# Altium PCB MotionClock.PcbDoc
Units mil, origin at the board's own origin, x right, y up, seen from the top; angles counter-clockwise.
Board outline 2550 x 2500 mil, 2 copper layers (Top Layer, Bottom Layer); 33 components, 30 nets, 129 pads, 0 vias.
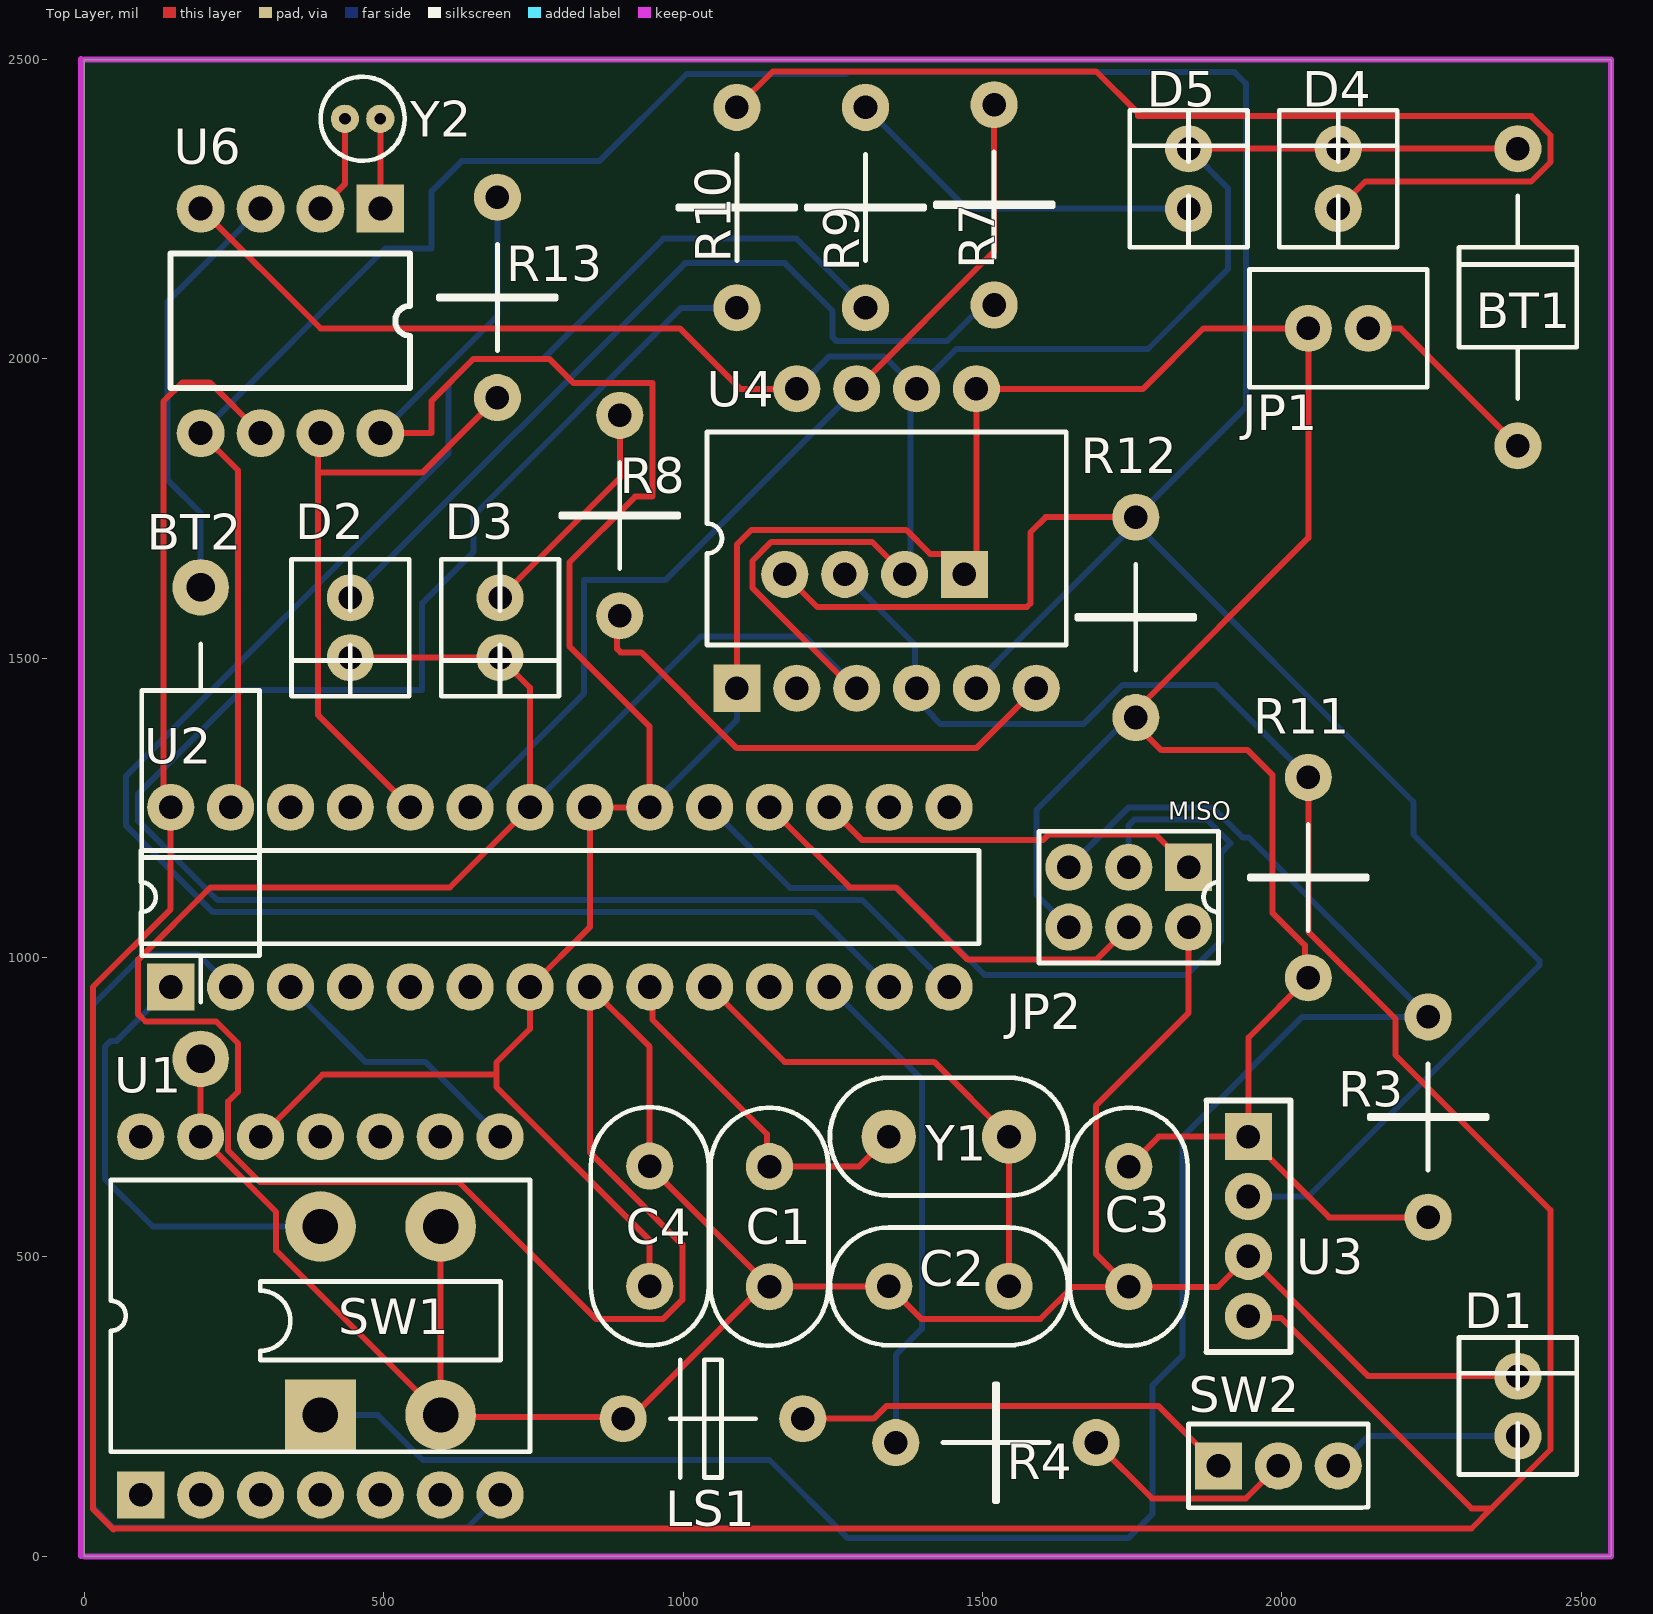
[diagram p0: Top Layer view]
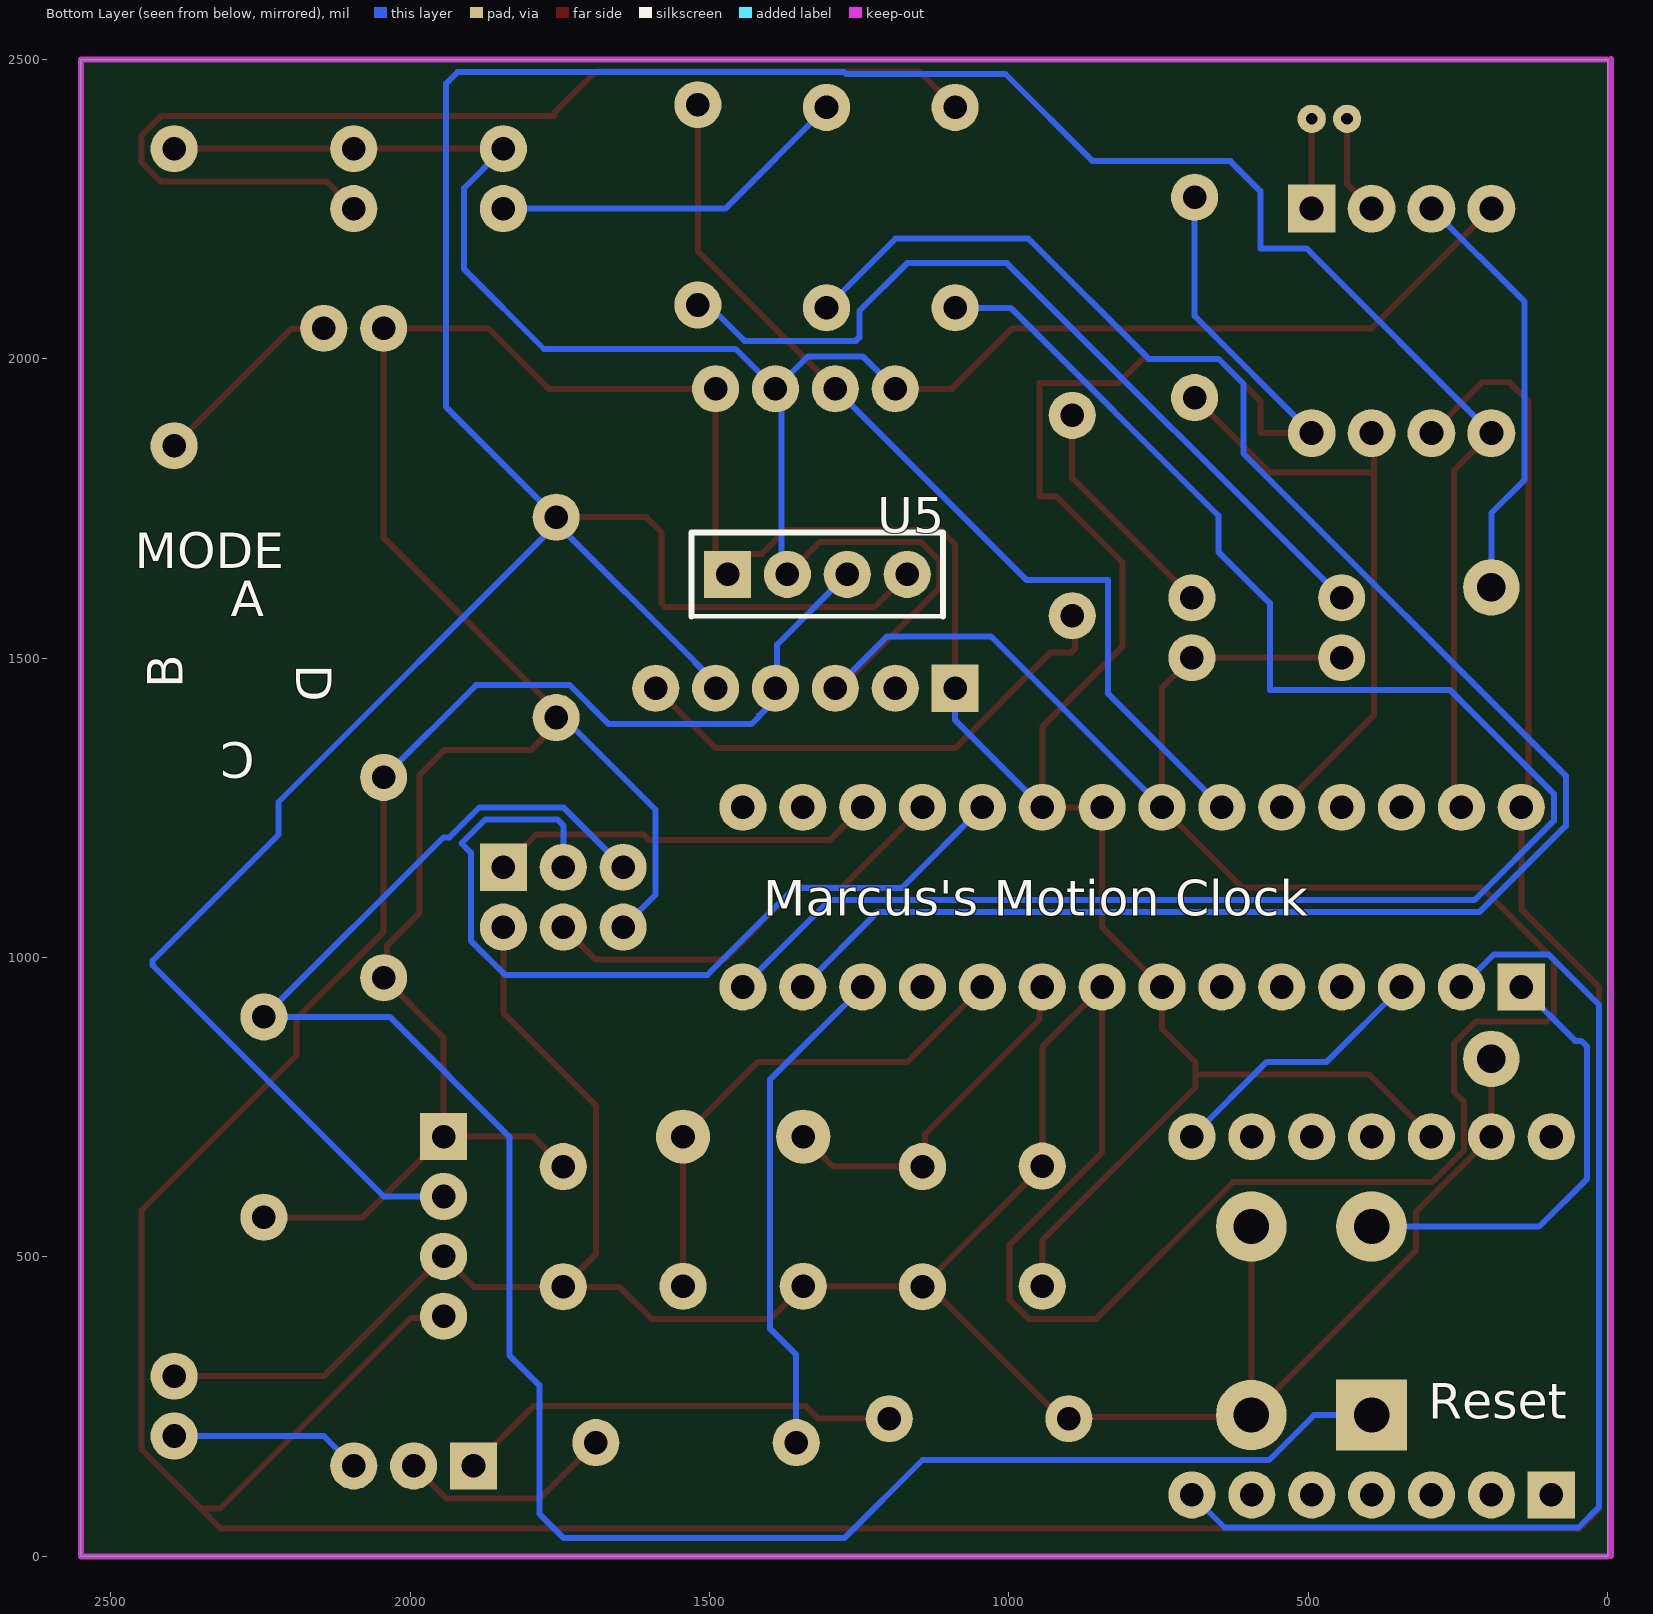
[diagram p1: Bottom Layer view, seen from below]

## Layer stack, top to bottom
Top Solder: solder mask 0.4, Solder Resist, Dk 3.5
Top Layer: signal copper 1.4
Dielectric 1: dielectric 12.6, FR-4, Dk 4.8
Bottom Layer: signal copper 1.4
Bottom Solder: solder mask 0.4, Solder Resist, Dk 3.5

## Board outline
2550,0 2550,2500 0,2500 0,0

## Design rules (kind name [scope] priority, off if disabled: settings)
Clearance [All] p1: gap=10 ignorepadtopadclearanceinfootprint=FALSE except(0: Arc-Hole Track-Hole SMDPad-Hole THPad-Hole Via-Hole Fill-Hole Poly-Hole Region-Hole Text-Hole)
PolygonConnect [All] p1: connectstyle=Relief reliefconductorwidth=10 reliefentries=4 polygonreliefangle="90 Angle" airgapwidth=10
RoomDefinition MotionClockSchematic [InComponentClass('MotionClockSchematic')] p1: confinementstyle=ConfineIn formatcopy=TRUE lockcomponents=FALSE outline -5.63,0.98 2544.37,0.98 2544.37,2500.98 -5.63,2500.98
RoutingVias [All] p1: holewidth=28 width=50 viastyle="Through Hole" minholewidth=28 minwidth=50 maxholewidth=28 maxwidth=50
SolderMaskExpansion [All] p1: expansion=4 istentingtop=FALSE
Width [All] p1: maxlimit=10 minlimit=10 preferedwidth=10
30 further rules are at their usual default settings.

## Components (designator, comment, footprint, x,y, rotation, side; value= is the part's Value field where it differs from the comment)
BT1 "Main 3V3 Battery" "MAIN BATTERY PINS" 2394.37,1854.92 r90 top
BT2 "Cell Battery" "CELL HOLDER" 194.37,1618.39 r270 top
C1 "20pF" CAPACITOR 1144.37,450.2 r90 top
C2 "20pF" CAPACITOR 1544.37,450.98 r180 top
C3 "100nF" CAPACITOR 1744.37,450.2 r90 top
C4 "100nF" CAPACITOR 944.37,450.98 r90 top
D1 "LED" LED 2394.37,200.98 r90 top
D2 "Double Tap" LED 444.37,1600.98 r270 top
D3 "Single Tap" LED 694.37,1600.98 r270 top
D4 "TEST LED 2" LED 2094.37,2250.98 r90 top
D5 "TEST LED 1" LED 1844.37,2250.98 r90 top
JP1 "Jumper" JUMPER 2044.37,2050.98 r0 top
JP2 "ISP Headers" "ISP HEADER" 1844.37,1150.98 r270 top
LS1 "Piezzo Buzzer" "PIEZZO BUZZER V2" 1200,230 r180 top
R3 "10k" RESISTOR 2244.37,566.34 r90 top
R4 "1k" RESISTOR 1690,190 r180 top
R7 "1k" RESISTOR 1519.47,2424.65 r270 top
R8 "1k" RESISTOR 894.37,1570.98 r90 top
R9 "1k" RESISTOR 1304.73,2420 r270 top
R10 "1k" RESISTOR 1090,2420 r270 top
R11 "10k" RESISTOR 2044.37,1300.98 r270 top
R12 "10k" RESISTOR 1756.31,1735.63 r270 top
R13 "10k" RESISTOR 690,2270 r270 top
SW1 "Pushbutton" ? 394.37,236.02 r90 top
SW2 "SPDT DIP Switch" SPDT 1894.37,150.98 r90 top
U1 "Seeduino Xiao" "SEEDUINO XIAO" 94.37,102.56 r90 top
U2 "Atmega328p" ATMEGA328P 144.37,950.98 r90 top
U3 "AM2320" AM2320 1944.37,700.98 r0 top
U4 "Accelerometer" ACCEL 1090,1450 r90 top
U5 "SSD1306 OLED" SSD1306 1470,1640 r90 bottom
U6 "MCP7940N" MCP7940N 494.37,2250.98 r270 top
Y1 "16MHz Crystal Oscil" "16MHZ CRYSTAL" 1544.37,700.98 r180 top
Y2 "32.768 kHz Crystal Oscil" 32.768KHZ 494.37,2400.98 r180 top

## Footprints (in the part's own frame and the unit in brackets; to place one, negate y for a bottom-side part, rotate by r counter-clockwise, add the part's x,y. Pads: shape width x height; smd on the part's side, far side on the other; paste and mask are expansions set on the pad)
"16MHZ CRYSTAL" [mm]
  round 2.3 hole 1: 1(0,0) 2(5.1,0)
  silkscreen extent -2.5,-2.5 7.6,2.5
32.768KHZ [mm]
  round 1.2 hole 0.5: 1(0,0) 2(1.5,0)
  silkscreen extent -1.03,-1.78 2.53,1.78
ACCEL [mm]
  round 2 hole 1: 1(12.7,-2.54) 2(12.7,-5.08) 3(12.7,-7.62) 4(12.7,-10.16) 6(0,-2.54) 7(0,-5.08) 8(0,-7.62) 9(0,-10.16) 10(0,-12.7)
  rect 2x2 hole 1: 5(0,0)
  silkscreen extent 1.84,-13.97 10.86,1.27
AM2320 [mm]
  rect 2x2 hole 1: 1(0,0)
  round 2 hole 1: 2(0,-5.08) 3(0,-7.62) 4(0,-2.54)
  silkscreen extent -1.78,-9.14 1.78,1.52
ATMEGA328P [mm]
  rect 2x2 hole 1: 1(0,0)
  round 2 hole 1: 2(0,-2.54) 3(0,-5.08) 4(0,-7.62) 5(0,-10.16) 6(0,-12.7) 7(0,-15.24) 8(0,-17.78) 9(0,-20.32) 10(0,-22.86) 11(0,-25.4) 12(0,-27.94) 13(0,-30.48) 14(0,-33.02) 15(7.62,-33.02) 16(7.62,-30.48) 17(7.62,-27.94) 18(7.62,-25.4) 19(7.62,-22.86) 20(7.62,-20.32) 21(7.62,-17.78) 22(7.62,-15.24) 23(7.62,-12.7) 24(7.62,-10.16) 25(7.62,-7.62) 26(7.62,-5.08) 27(7.62,-2.54) 28(7.62,0)
  silkscreen extent 1.84,-34.29 5.78,1.27
CAPACITOR [mm]
  round 2 hole 1: 1(0,0) 2(5.1,0)
  silkscreen extent -2.5,-2.5 7.6,2.5
"CELL HOLDER" [mm]
  round 2.4 hole 1.2: A(0,0) K(20,0)
  silkscreen extent 2.4,-2.5 17.6,2.5
"ISP HEADER" [mm]
  rect 2x2 hole 1: 1(0,0)
  round 2 hole 1: 2(0,-2.54) 3(0,-5.08) 4(2.54,-5.08) 5(2.54,-2.54) 6(2.54,0)
  silkscreen extent -1.52,-6.35 4.06,1.27
JUMPER [mm]
  round 2 hole 1: 1(0,0) 2(2.54,0)
  silkscreen extent -2.5,-2.5 5.04,2.5
LED [mm]
  round 2 hole 1: A(0,0) K(2.54,0)
  silkscreen extent -1.64,-2.5 4.18,2.5
"MAIN BATTERY PINS" [mm]
  round 2 hole 1: A(0,0) K(12.6,0)
  silkscreen extent 2,-2.5 10.6,2.5
MCP7940N [mil]
  rect 80x80 hole 40: 1(0,0)
  round 80 hole 40: 2(0,-100) 3(0,-200) 4(0,-300) 5(375,-300) 6(375,-200) 7(375,-100) 8(375,0)
  silkscreen extent 75,-350 300,50
"PIEZZO BUZZER V2" [mm]
  round 2 hole 1: A(0,0) K(7.62,0)
  silkscreen extent 2,-2.5 5.62,2.5
RESISTOR [mm]
  round 2 hole 1: 1(0,0) 2(8.5,0)
  silkscreen extent 2,-2.5 6.5,2.5
"SEEDUINO XIAO" [mm]
  round 2 hole 1: 1(15.2,-5.08) 2(15.2,-2.54) 3(15.2,-15.24) 4(0,-15.24) 5(0,-10.16) 6(0,-12.7) 7(0,-5.08) 8(0,-7.62) 9(15.2,-12.7) 10(15.2,-10.16) 11(15.2,-7.62) 12(0,-2.54) 14(15.2,0)
  rect 2x2 hole 1: 13(0,0)
  silkscreen extent 1.84,-16.51 13.36,1.27
SPDT [mm]
  round 2 hole 1: 1(0,-2.54) 3(0,-5.08)
  rect 2x2 hole 1: 2(0,0)
  silkscreen extent -1.78,-6.35 1.78,1.27
SSD1306 [mm]
  rect 2x2 hole 1: 1(0,0)
  round 2 hole 1: 2(0,-2.54) 3(0,-5.08) 4(0,-7.62)
  silkscreen extent -1.78,-9.14 1.78,1.52
? [mm]
  rect 3x3 hole 1.5: 1(0,0)
  round 3 hole 1.5: 2(0,-5.1) 3(8,0) 4(8,-5.1)
  silkscreen extent 2.33,-7.65 5.67,2.55

## Part data
C1 C2 C3 C4: library part Capacitor
D2 D3 D4 D5: library part LED
R3 R11 R12 R13: library part "10k Resistor"
R4 R7 R8 R9 R10: library part "1k Resistor"

## Nets (pads, with @x,y where several pads share a name; then routed paths per layer and width w, separated by ;. In a path a pad name is that pad's centre, name@x,y a point inside that pad or via, vN(x,y) a via of type N, cw(c..) or ccw(c..) an arc to the next point about the centre after c; other vN are vias at no path point)
+3V3: C3.2 C4.1 JP1.1 JP2.4 R3.1 R11.2 R12.2 R13.1 U1.1 U2.7 U2.20 U2.21 U3.1 U4.4 U4.5 U5.1 U6.8 | length 7947.6
  Top Layer w10: U1.1 397.82,804.43 688.51,804.43 ; U6.8 580,1875.98 580,1930 650,2000 776.69,2000 816.69,1960 948.74,1960 948.74,1770 920,1770 810,1660 810,1520 944.37,1385.63 U2.20 U2.21 844.37,1050.98 U2.7 744.37,880.98 688.51,825.13 688.51,804.43 ; C4.1 944.37,527.88 688.51,783.73 688.51,804.43 ; U4.5 1090,1690 1114.37,1714.37 1372.52,1714.37 1412.52,1674.37 1435.63,1674.37 U5.1 1490,1660 U4.4 1768.39,1950 1869.37,2050.98 JP1.1 2044.37,1700.98 1744.37,1400.98 1798.88,1346.48 1943.02,1346.48 1984.37,1305.13 1984.37,1074.95 2038.61,1020.71 2038.61,972.1 R11.2 1944.37,866.34 U3.1 ; C3.2 1794.37,700.98 U3.1 ; R3.1 2079.02,566.34 U3.1
  Bottom Layer w10: U6.8 690,2071.61 R13.1 ; U2.20 1090,1396.61 U4.5 ; JP2.4 1590,1105.35 1590,1246.61 R12.2@1744.37,1400.98
GND: BT1.K BT2.K C1.1 C2.2 C3.1 C4.2 D1.K D2.K D3.K D4.K D5.K JP2.6 LS1.K SW1.2 SW1.4 U1.2 U2.8 U2.22 U3.2 U4.1 U4.3 U4.7 U5.2 U6.4 | length 11974.3
  Top Layer w10: BT2.K U1.2 320.31,575.04 320.31,510.87 SW1.2 ; U6.4 394.49,2050.86 994.49,2050.86 1095.35,1950 U4.1 ; D2.K D3.K 744.37,1450.98 U2.22 610.59,1117.2 210.63,1117.2 90,996.57 90,905.4 102.17,893.23 220.15,893.23 256.61,856.77 256.61,775.92 240,759.31 240,678.46 293.42,625.04 625.83,625.04 854.26,396.61 966.89,396.61 998.74,428.46 998.74,520.51 844.37,674.88 U2.8 944.37,850.98 C4.2 944.37,650.98 1144.37,450.98 C1.1 ; SW1.4@595.16,504.84 SW1.2 ; U4.7 1283.11,1450 1115.63,1617.48 1115.63,1662.52 1147.48,1694.37 1315.63,1694.37 U5.2 U5.2@1380,1650 ; U4.3@1380,1940 U4.3 ; JP2.6 1844.37,907.61 1690,753.24 1690,504.57 C3.1 ; D5.K D4.K BT1.K ; D1.K 2144.37,300.98 U3.2 1893.58,450.2 C3.1 ; SW1.2 598.17,233.01 896.99,233.01 LS1.K 912.09,230 1132.28,450.2 C1.1 ; C1.1 1144.76,450.59 1343.19,450.59 C2.2 1397.95,396.61 1597.02,396.61 1650.6,450.2 C3.1
  Bottom Layer w10: U2.22 1030,1536.61 1203.39,1536.61 U4.7 ; U4.1 1244.37,2004.37 1335.63,2004.37 U4.3 ; U5.2 1380,1650 1380,1940 U4.3 ; D5.K 1910,2285.35 1910,2150 1776.58,2016.58 1456.58,2016.58 U4.3
NetBT1_A: BT1.A JP1.2 | length 331.2
  Top Layer w10: JP1.2 2144.8,2050.55 2198.74,2050.55 BT1.A
NetBT2_A: BT2.A U6.3 | length 719.6
  Bottom Layer w10: BT2.A 194.37,1742.51 139.37,1797.51 139.37,2095.98 U6.3
NetC1_2: C1.2 U2.9 Y1.2 | length 602.8
  Top Layer w10: U2.9 948.74,946.61 948.74,896.61 1140,705.35 1140,655.35 C1.2 1293.58,650.98 Y1.2
NetC2_1: C2.1 U2.10 Y1.1 | length 853.6
  Top Layer w10: U2.10 1169.37,825.98 1419.37,825.98 Y1.1 C2.1
NetD1_A: D1.A SW2.3 | length 320.7
  Bottom Layer w10: SW2.3 2144.37,200.98 D1.A
NetD2_A: D2.A R7.2 | length 1411.2
  Bottom Layer w10: D2.A 1003.39,2160 1170,2160 1250,2080 1250,2035.86 1255.86,2030 1441.72,2030 1501.72,2090 R7.2
NetD3_A: D3.A R8.2 | length 387.5
  Top Layer w10: D3.A 894.37,1800.98 R8.2
NetD4_A: D4.A R10.1 | length 1861.9
  Top Layer w10: R10.1 1150,2480 1690,2480 1760,2410 1760,2405.35 2416.89,2405.35 2448.74,2373.51 2448.74,2328.46 2416.58,2296.3 2139.69,2296.3 D4.A
NetD5_A: D5.A R9.1 | length 609.6
  Bottom Layer w10: R9.1 1473.75,2250.98 D5.A
NetJP2_1: JP2.1 U2.17 | length 648.7
  Top Layer w10: U2.17 1298.74,1196.61 1601.55,1196.61 1610.29,1205.35 1790,1205.35 JP2.1
NetJP2_2: JP2.2 U2.19 | length 1423.9
  Bottom Layer w10: U2.19 1179.05,1116.3 1358.35,1116.3 1503.67,970.98 1841.26,970.98 1898.74,1028.46 1898.74,1175.35 1914.37,1190.98 1874.37,1230.98 1754.37,1230.98 1744.37,1220.98 JP2.2
NetJP2_3: JP2.3 R3.2 SW1.1 | length 3421.4
  Bottom Layer w10: SW1.1 490.43,236.02 565.47,160.98 1144.37,160.98 1274.37,30.98 1744.37,30.98 1784.37,70.98 1784.37,285.98 1834.37,335.98 1834.37,700.98 2034.37,900.98 R3.2 1944.37,1200.98 1934.37,1200.98 1884.37,1250.98 1744.37,1250.98 JP2.3
NetJP2_5: JP2.5 U2.18 | length 727.9
  Top Layer w10: U2.18 1278.13,1117.22 1355.02,1117.22 1475.63,996.61 1690,996.61 JP2.5
NetLS1_A: LS1.A SW2.2 | length 744.5
  Top Layer w10: LS1.A 1318.46,230 1339.45,250.98 1794.37,250.98 SW2.2
NetR4_1: R4.1 SW2.1 | length 365.6
  Top Layer w10: R4.1 1783.39,96.61 1940,96.61 SW2.1
NetR4_2: R4.2 U2.12 | length 842.9
  Bottom Layer w10: U2.12 1398.74,796.61 1398.74,380 1355.35,336.61 R4.2
NetR7_1: R7.1 U2.23 U4.2 | length 1616.2
  Top Layer w10: U4.2 1519.47,2179.47 R7.1
  Bottom Layer w10: U2.23 834.37,1440.98 834.37,1630.98 970.98,1630.98 U4.2
NetR8_1: R8.1 U4.10 | length 867.1
  Top Layer w10: R8.1 890,1566.61 890,1515.86 895.86,1510 930,1510 1090,1350 1490,1350 U4.10
NetR9_2: R9.2 U2.13 | length 3191.8
  Bottom Layer w10: R9.2 1189.1,2200.98 967.48,2200.98 766.5,2000 650,2000 608.25,1958.25 608.25,1841.75 70,1303.5 70,1220.18 213.88,1076.3 1219.05,1076.3 U2.13
NetR10_2: R10.2 U2.14 | length 2971.2
  Bottom Layer w10: R10.2 997.2,2085.35 650.23,1738.38 650.23,1677.87 564.37,1592.02 564.37,1446.61 263.11,1446.61 90,1273.5 90,1228.46 222.16,1096.3 1299.05,1096.3 U2.14
NetR11_1: R11.1 U2.28 U3.3 U4.8 U5.3 U6.6 | length 7507.6
  Top Layer w10: U6.6 209.37,1960.98 164.37,1960.98 132.13,1928.74 132.13,1263.23 U2.28 144.37,1080.98 14.37,950.98 14.37,79.27 48.51,45.13 50,46.61 2316.89,46.61 2350.14,79.86 ; U3.3@1939.21,395.83 U3.3 1947.12,398.24 1998.74,398.24 2317.12,79.86 2350.14,79.86 ; R11.1 2044.37,1043.23 2190,897.6 2190,836.98 2448.74,578.24 2448.74,178.46 2350.14,79.86
  Bottom Layer w10: U2.28@144.37,1240.98 U2.28 ; U5.3 1387.03,1522.97 1387.03,1452.97 U4.8 1390,1431.4 1417.3,1404.1 1417.3,1402.7 1430,1390 1668.43,1390 1733.79,1455.35 1890,1455.35 R11.1 R11.1@2027.48,1300.98
NetR12_1: R12.1 U2.27 U3.4 U4.9 U5.4 U6.5 | length 6365.2
  Top Layer w10: U6.5 256.61,1813.74 256.61,1263.23 U2.27 ; U5.4 1224.37,1585.63 1574.14,1585.63 1580,1591.49 1580,1710 1605.63,1735.63 R12.1
  Bottom Layer w10: U6.5 503.07,2184.69 580,2184.69 580,2280 630.27,2330.27 860.27,2330.27 1005.86,2475.86 1272.34,2475.86 1275.5,2479.02 1920.98,2479.02 1940,2460 1940,1919.32 R12.1 1756.31,1725.97 R12.1@1755.17,1724.83 ; U4.9 U4.9@1490,1458.15 ; U3.4 2044.37,600.98 2430.23,986.84 2430.23,995.13 2220,1205.35 2220,1260 R12.1@1755.17,1724.83 ; U4.9@1490,1458.15 1490,1459.66 1524.37,1494.03 ; U4.9@1490,1458.15 1524.37,1492.52 1524.37,1494.03 ; 1524.37,1494.03 R12.1@1755.17,1724.83
NetR13_2: R13.2 U2.24 U6.7 | length 1042.7
  Top Layer w10: U6.7 390,1871.61 390,1810 ; U2.24 390,1405.35 390,1810 ; R13.2 564.65,1810 390,1810
NetSW1_3: SW1.3 U2.1 | length 764.6
  Bottom Layer w10: U2.1 54.37,860.98 44.37,860.98 34.37,850.98 34.37,630.98 114.37,550.98 SW1.3
NetU1_3: U1.3 U2.3 | length 453.6
  Bottom Layer w10: U2.3 469.37,825.98 569.37,825.98 U1.3
NetU1_4: U1.4 U2.2 | length 1842.6
  Bottom Layer w10: U2.2 190,1005.35 98.79,1005.35 14.37,920.94 14.37,82.61 48.79,48.19 640,48.19 U1.4
NetU6_1: U6.1 Y2.1 | length 150
  Top Layer w10: U6.1 Y2.1
NetU6_2: U6.2 Y2.2 | length 167
  Top Layer w10: U6.2 435.31,2291.93 Y2.2
pads on no net: U1.5 U1.6 U1.7 U1.8 U1.9 U1.10 U1.11 U1.12 U1.13 U1.14 U2.4 U2.5 U2.6 U2.11 U2.15 U2.16 U2.25 U2.26 U4.6

## Keep-outs
Keep-Out Layer:
  lines w10: -5.63,0.98 -5.63,2500.98 ; 0,0 2550,0 2550,2500 0,2500

## Silkscreen, mask and mechanical layers (free items; w line width, h text height)
Top Overlay:
  text "MISO" at 1810,1230 h30
Bottom Overlay:
  text "MODE" at 2460,1650 h60
  text "A" at 2300,1570 h60
  text "D" at 2190,1490 h60 r90
  text "B" at 2380,1450 h60 r270
  text "C" at 2260,1360 h60 r180
  text "Marcus's Motion Clock" at 1410,1070 h60
  text "Reset" at 300,230 h60
Mechanical 1:
  lines w10: -5.63,0.98 -5.63,2500.98 ; 0,0 2550,0 2550,2500 0,2500